# Altium PCB BI_820_Trek_OBD_main_hv2.PcbDoc
Units mm, origin at the board's own origin, x right, y up, seen from the top; angles counter-clockwise.
Board outline 75 x 64 mm, 4 copper layers (Top Layer, GND, VCC, Bottom Layer), stack 1.676 mm thick; 113 components, 73 nets, 415 pads, 243 vias.
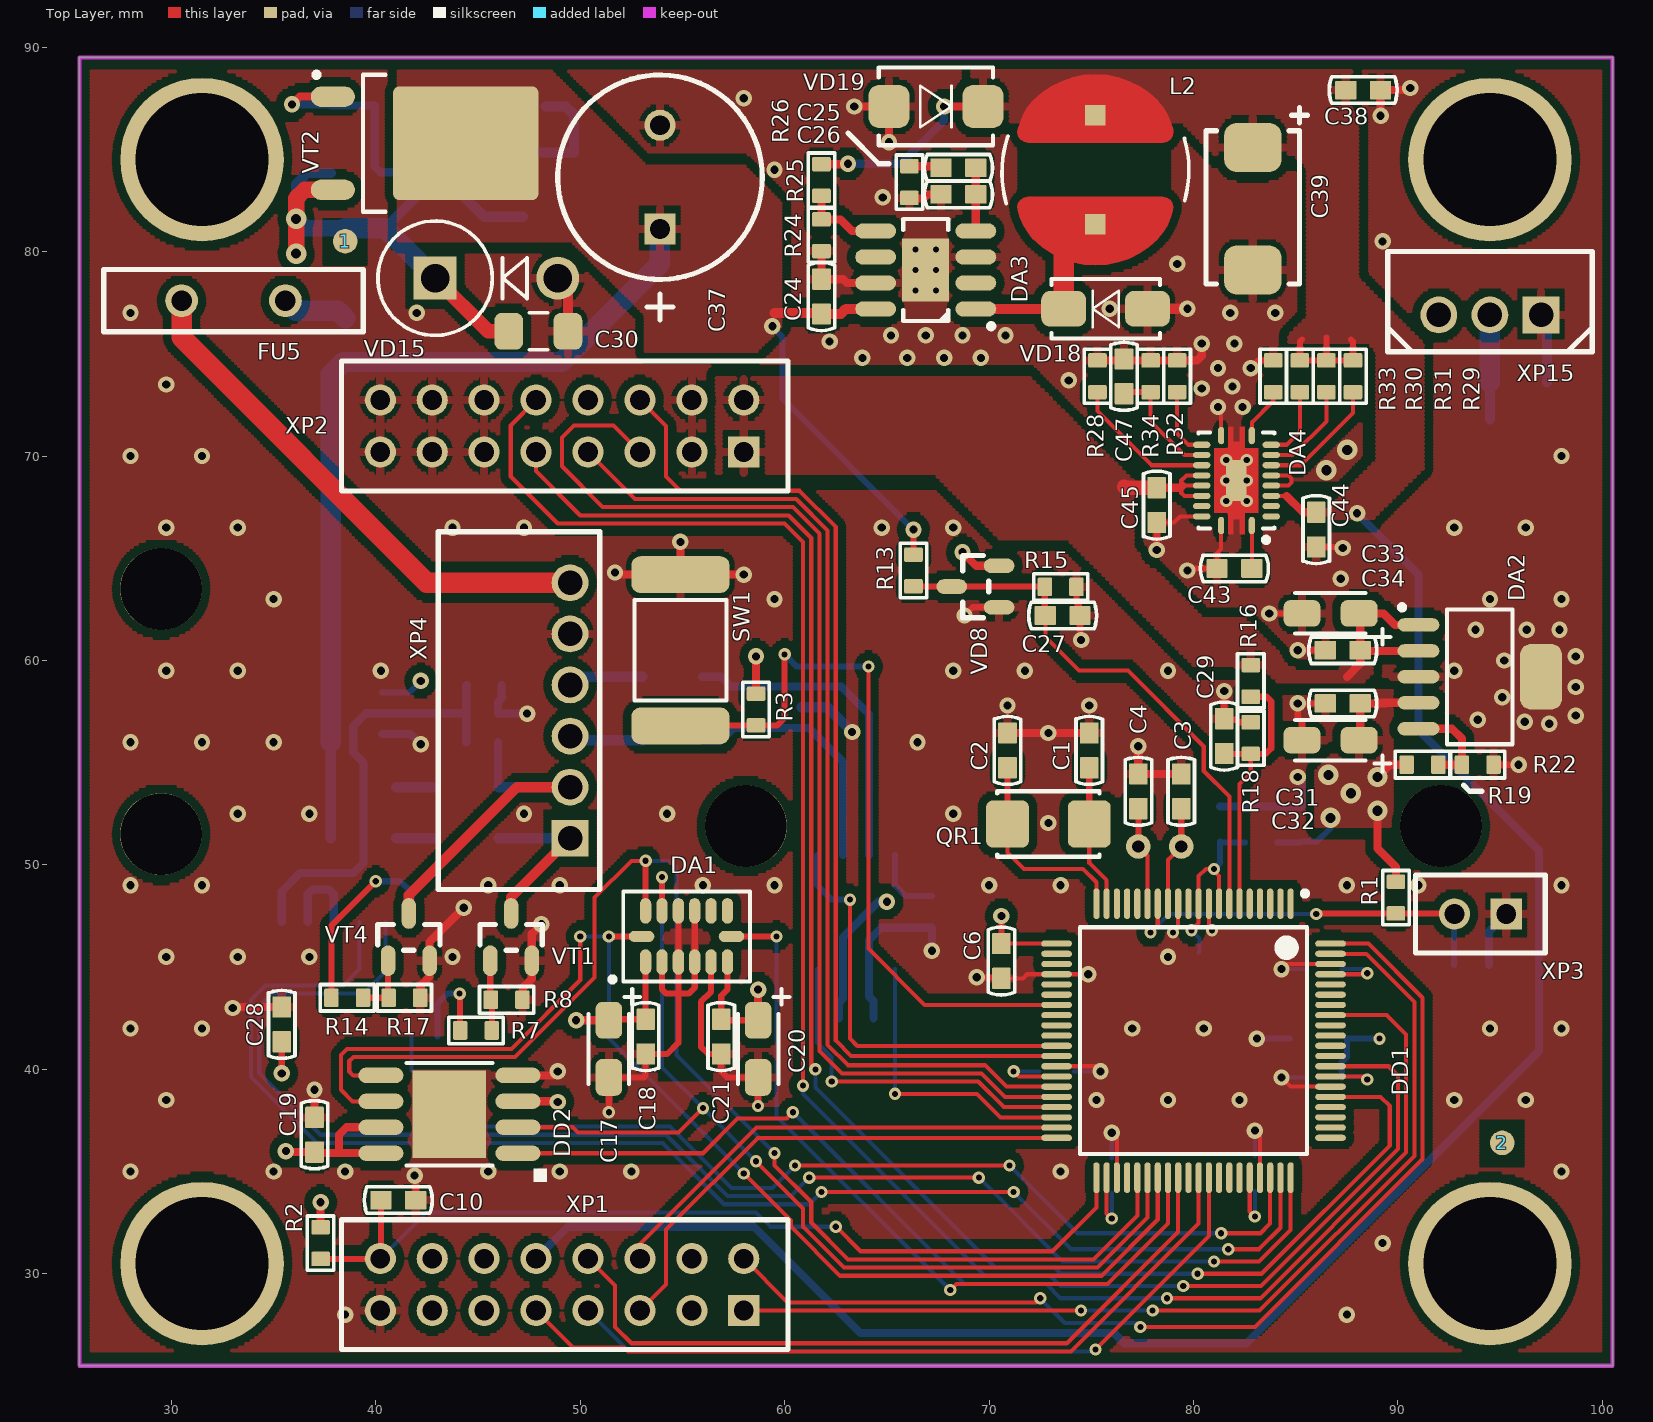
[diagram p0: Top Layer view]
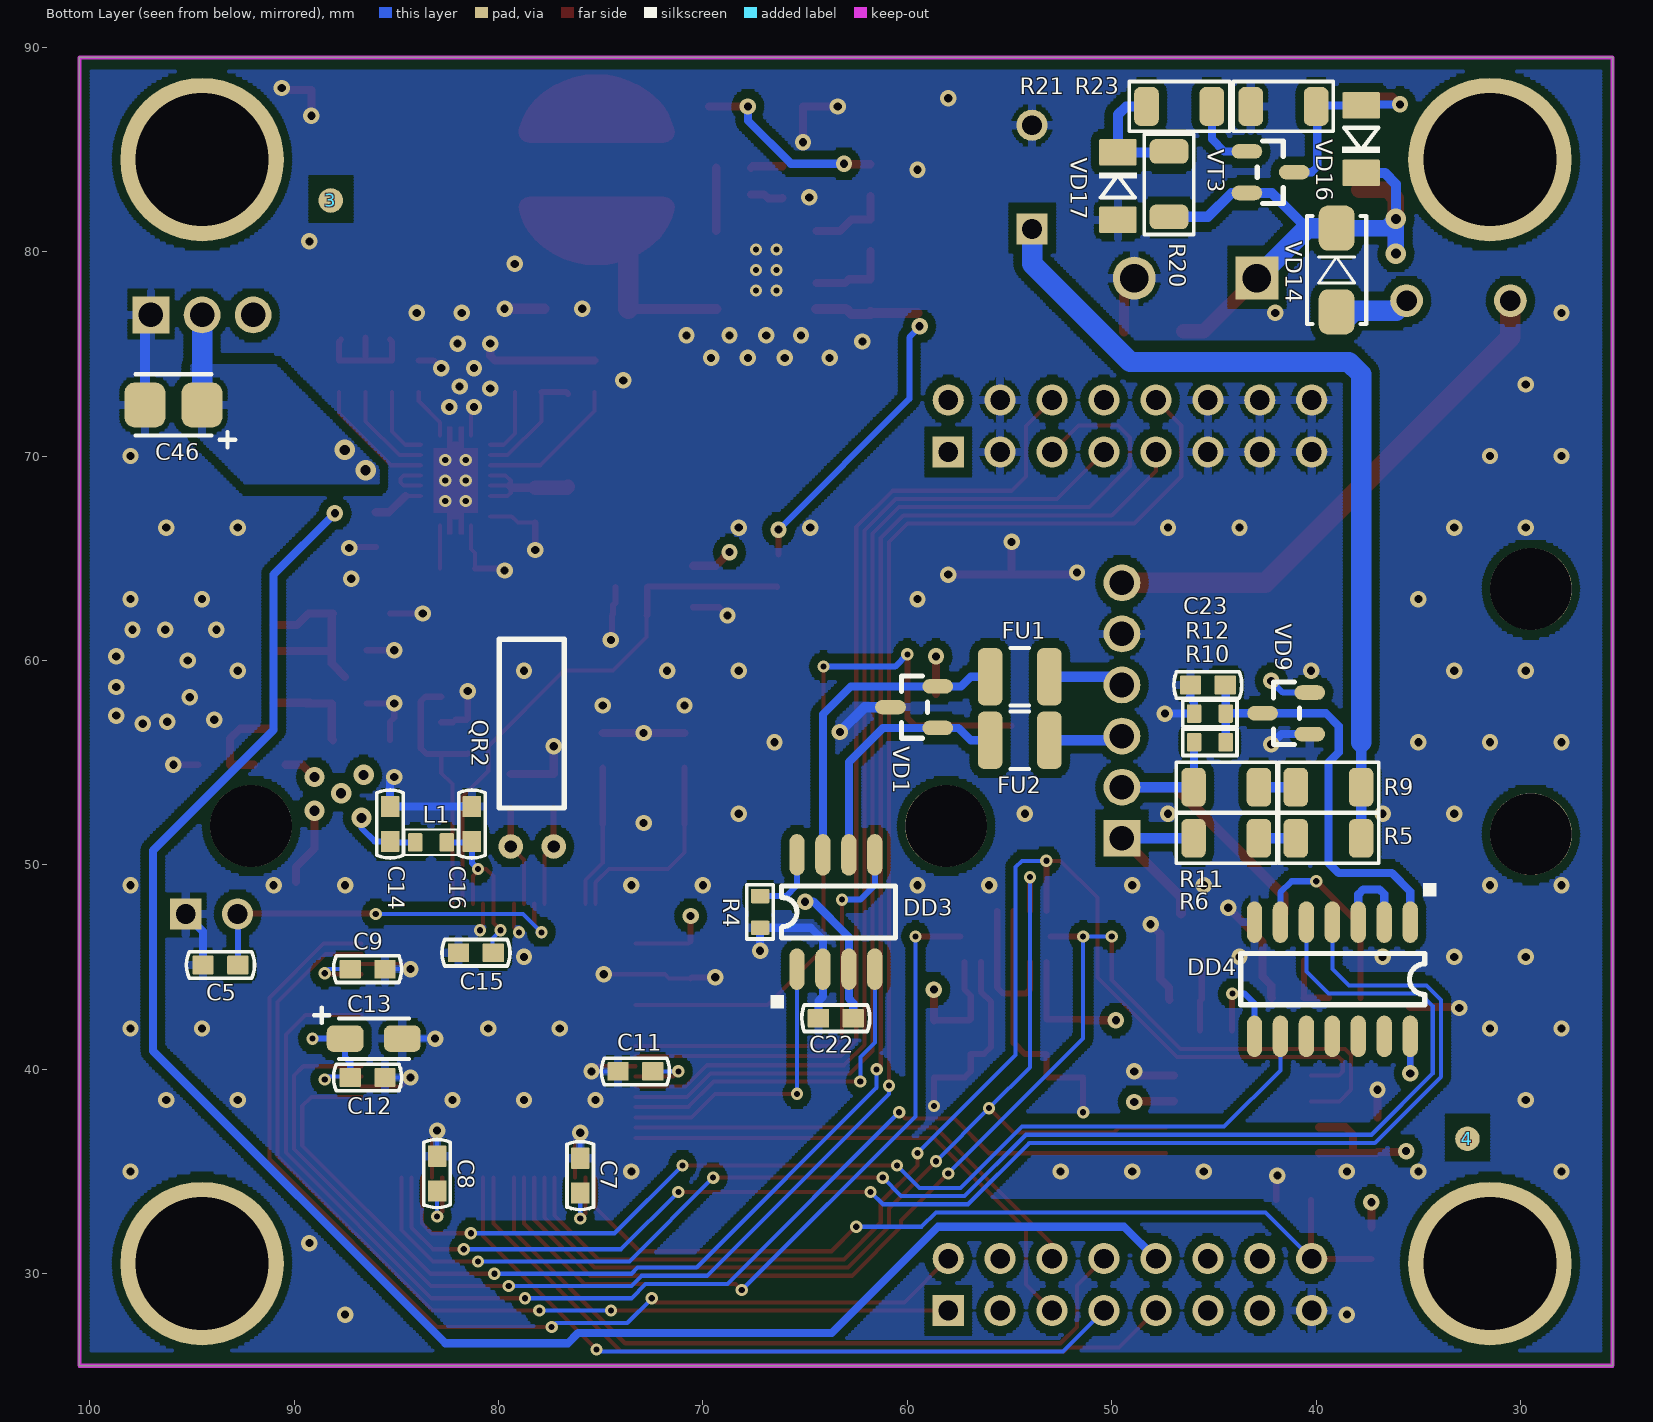
[diagram p1: Bottom Layer view, seen from below]
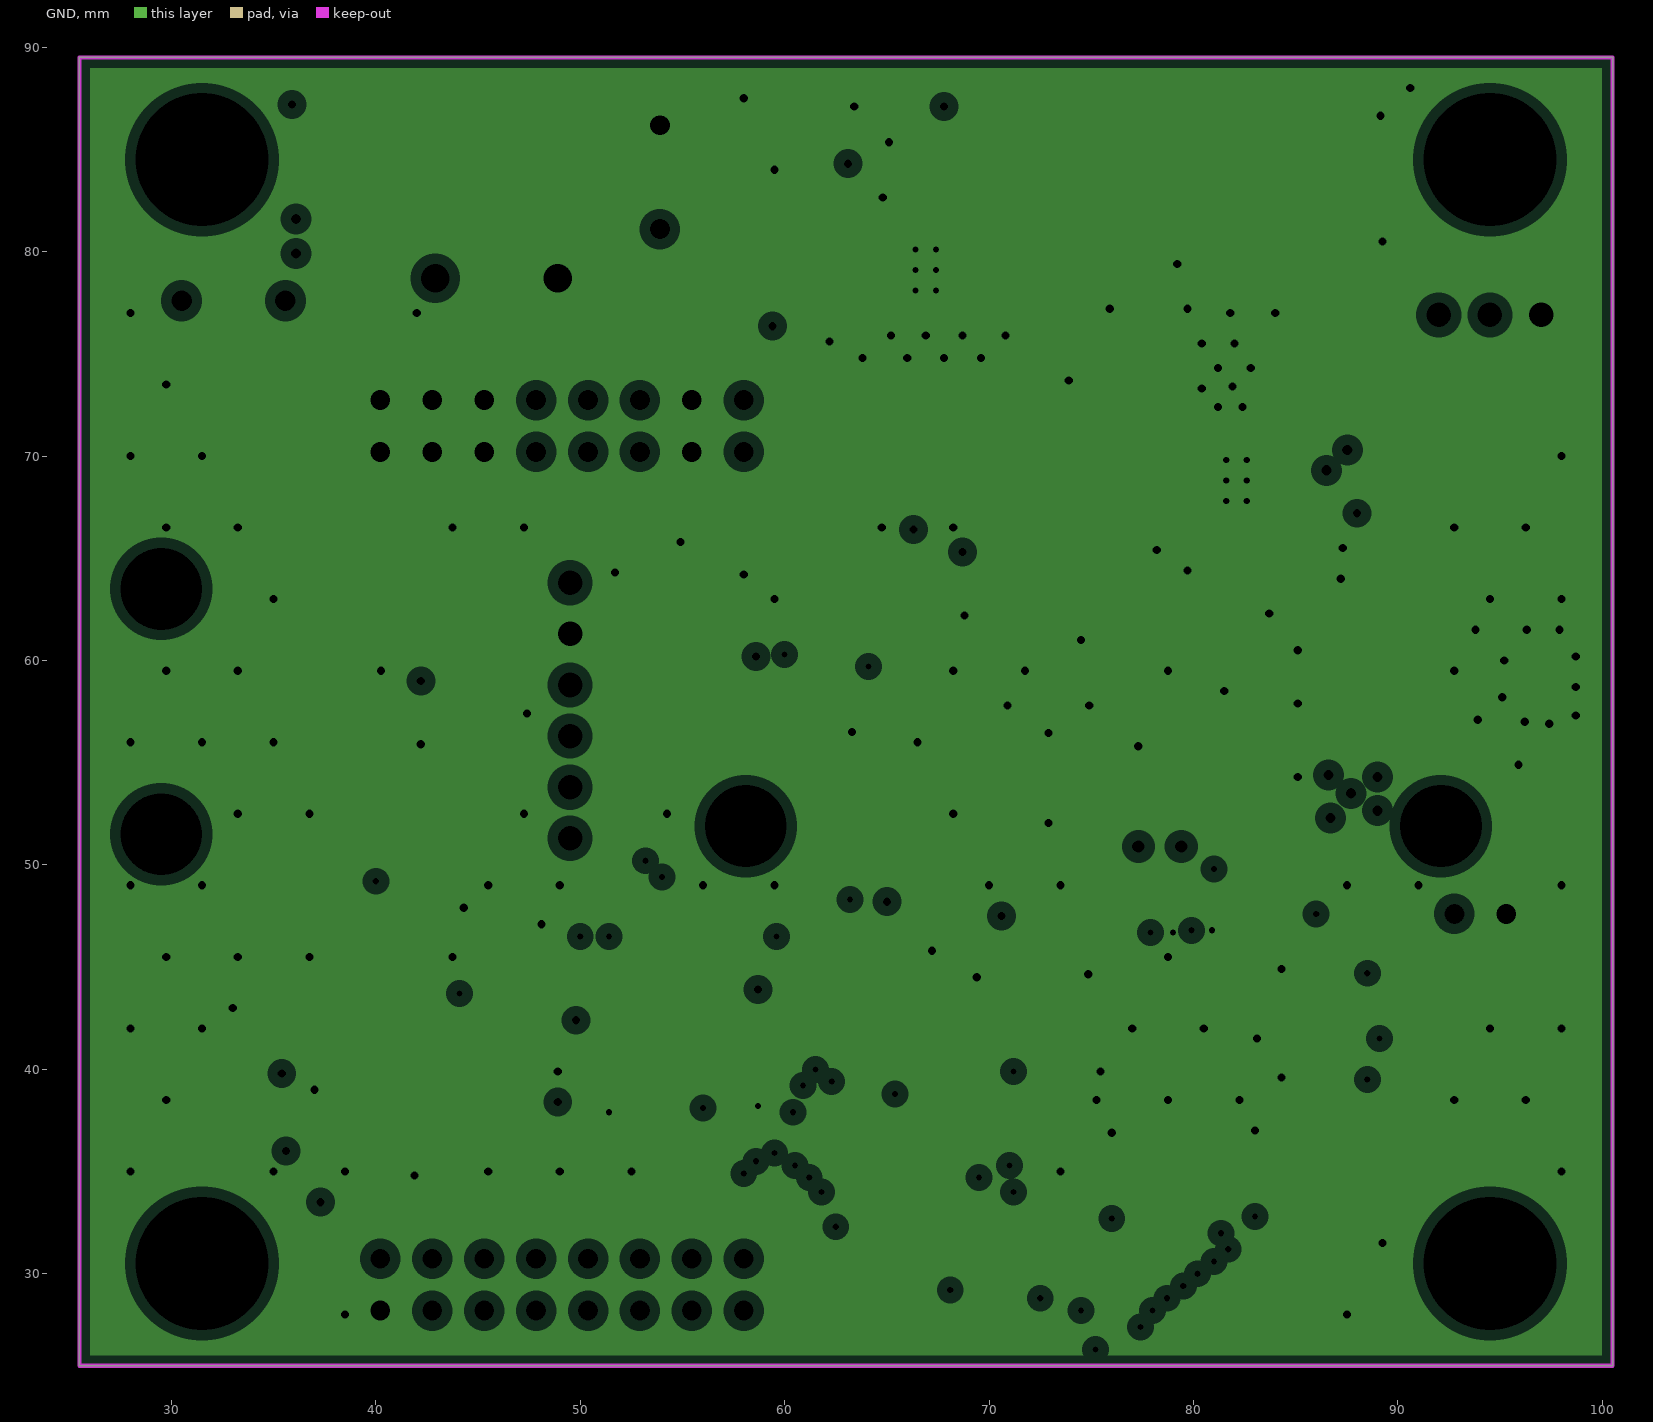
[diagram p2: GND, clearances drawn from the general rule]
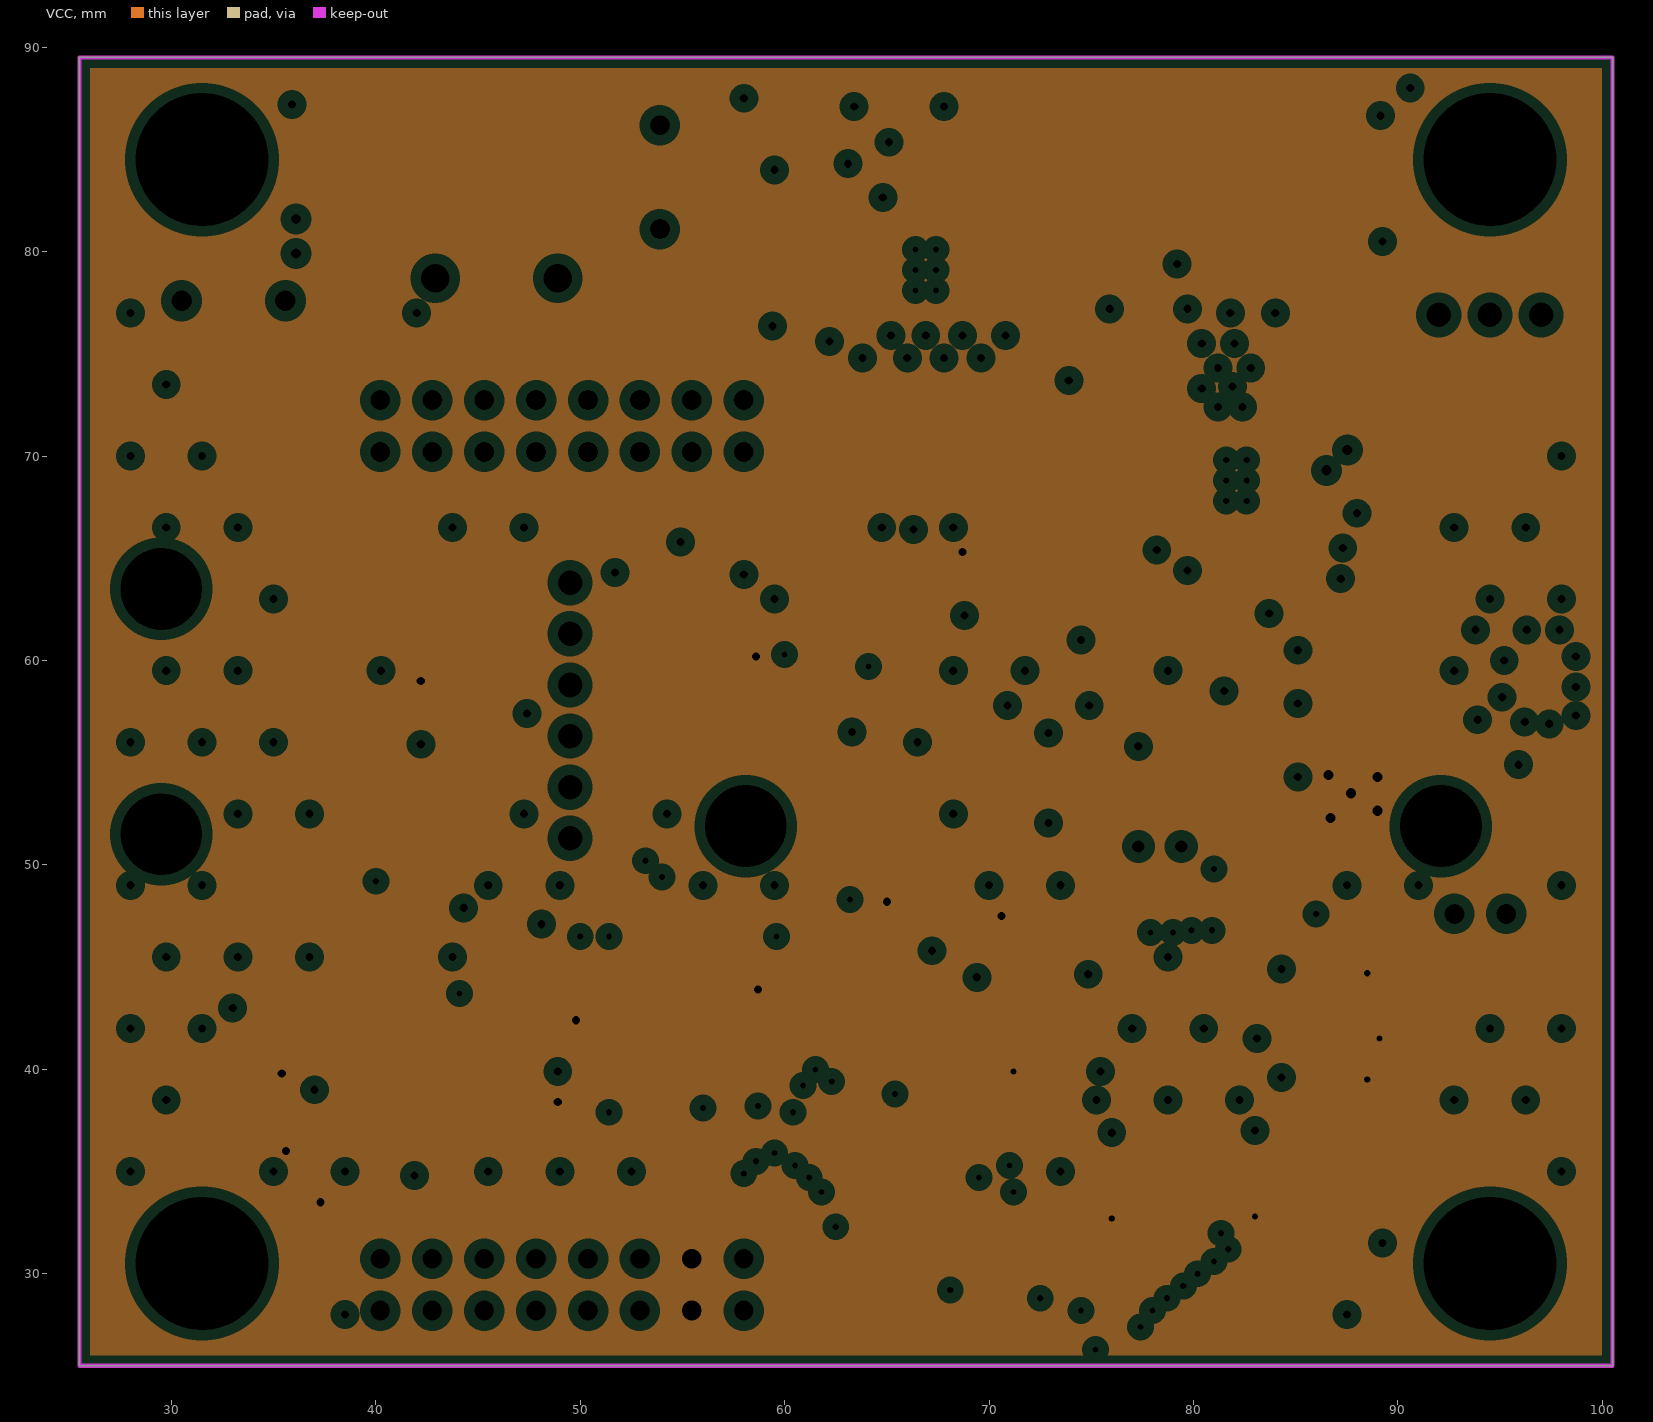
[diagram p3: VCC, clearances drawn from the general rule]

## Layer stack, top to bottom
Top Solder: solder mask 0.0102, Solder Resist, Dk 3.5
Top Layer: signal copper 0.035
Dielectric1: prepreg 0.25, FR-4, Dk 4.4
GND: plane copper 0.018, net GND
Dielectric2: core 1, FR-4, Dk 4.4
VCC: plane copper 0.018, net +3V
Dielectric3: prepreg 0.32, FR-4, Dk 4.8
Bottom Layer: signal copper 0.035
Bottom Solder: solder mask 0.0102, Solder Resist, Dk 3.5

## Board outline
25.5,25.5 100.5,25.5 100.5,89.5 25.5,89.5

## Design rules (kind name [scope] priority, off if disabled: settings)
Clearance Clearance_keepout [IsKeepOut] p1: gap=0.4
Clearance Clearance_Poly [All vs InPoly] p2: gap=0.4
Clearance [All] p3: gap=0.2
ComponentClearance [All] p1: gap=0 collisioncheckmode=3 verticalgap=0 showdistances=FALSE
HoleSize [All] p1: absolutevalues=TRUE maxlimit=8 minlimit=0.025 maxpercent=80.000 minpercent=20.000
MinimumSolderMaskSliver [All] p1: minsoldermaskwidth=0.076
PlaneClearance [All] p1: clearance=0.508
PlaneConnect [All] p1: planeconnectstyle=Relief reliefexpansion=0.2 reliefentries=4 reliefconductorwidth=0.254 reliefairgap=0.2
PolygonConnect PolygonConnect_DA2 [IsPad And (PadYSize_TopLayer > 1.5) And (InComponent(DA2) Or InComponent(DA3))] p1: connectstyle=Direct reliefconductorwidth=0.254 reliefentries=4 polygonreliefangle="90 Angle" airgapwidth=0.254
PolygonConnect PolygonConnect_Thermal [PadYSize_TopLayer > 3] p2: connectstyle=Direct reliefconductorwidth=0.254 reliefentries=4 polygonreliefangle="90 Angle" airgapwidth=0.254
PolygonConnect PolygonConnect_VIA [IsVia] p3: connectstyle=Direct reliefconductorwidth=0.254 reliefentries=4 polygonreliefangle="90 Angle" airgapwidth=0.254
PolygonConnect [All] p4: connectstyle=Relief reliefconductorwidth=0.4 reliefentries=4 polygonreliefangle="90 Angle" airgapwidth=0.254
RoutingVias [All] p1: holewidth=0.3 width=0.6 viastyle="Through Hole" minholewidth=0.3 minwidth=0.6 maxholewidth=0.5 maxwidth=1
SilkToSilkClearance [All] p1: silktosilkclearance=0
SilkToSolderMaskClearance SilkToSolderMaskClearance1 [IsPad And (InComponent('DA4') Or InComponent('L2'))] p1: minsilkscreentomaskgap=0 clearancetoexposedcopper=TRUE
SilkToSolderMaskClearance SilkscreenOverComponentPads [IsPad] p2: minsilkscreentomaskgap=0.05 clearancetoexposedcopper=TRUE
SolderMaskExpansion SolderMaskExpansion_DA1 [IsPad And InComponent(DA1)] p1: expansion=0.05
SolderMaskExpansion SolderMaskExpansion_VIA [IsVia] p2: expansion=-25.4
SolderMaskExpansion SolderMaskExpansion_1 [IsPad And PadYSize_TopLayer < 0.4] p3: expansion=0.05
SolderMaskExpansion [All] p4: expansion=0.076
Width [All] p1: maxlimit=1 minlimit=0.2 preferedwidth=0.3
23 further rules are at their usual default settings.

## Classes and differential pairs
component class CPU: C1 C2 C3 C4 C5 C6 C7 C8 C9 C10 C11 C12 C13 C14 C15 C16 C17 C18 C19 C20 C21 DA1 DD1 DD2 L1 QR1 QR2 R1 R2 R3 SW1 XP3
component class IO: C22 C23 C27 C28 C29 DD3 DD4 FU1 FU2 R4 R5 R6 R7 R8 R9 R10 R11 R12 R13 R14 R15 R16 R17 R18 VD1 VD8 VD9 VT1 VT4 XP1 XP2 XP4
component class Power: C24 C25 C26 C30 C31 C32 C33 C34 C37 C38 C39 C43 C44 C45 C46 C47 DA2 DA3 DA4 FU5 L2 R19 R20 R21 R22 R23 R24 R25 R26 R28 R29 R30 R31 R32 R33 R34 VD14 VD15 VD16 VD17 VD18 VD19 VT2 VT3 XP15

## Components (designator, comment, footprint, x,y, rotation, side; value= is the part's Value field where it differs from the comment)
1 "Comment" REPER1.2 38.5,80.5 r0 top
2 "Comment" REPER1.2 95.1,36.4 r0 top
3 "Comment" REPER1.2 88.2,82.5 r180 bottom
4 "Comment" REPER1.2 32.6,36.6 r180 bottom
C1 "22 pF" CC0603-3M 74.9,55.6 r270 top
C2 "22 pF" CC0603-3M 70.9,55.6 r270 top
C3 "22 pF" CC0603-3M 79.4,53.6 r270 top
C4 "22 pF" CC0603-3M 77.3,53.6 r270 top
C5 "220 pF" CC0603-3M 93.6,45.1 r180 bottom
C6 "0.1 uF" CC0603-3M 70.6,45.3 r90 top
C7 "0.1 uF" CC0603-3M 76,34.8 r270 bottom
C8 "0.1 uF" CC0603-3M 83,34.9 r270 bottom
C9 "0.1 uF" CC0603-3M 86.4,44.9 r0 bottom
C10 "220 pF" CC0603-3M 41.1,33.6 r0 top
C11 "0.1 uF" CC0603-3M 73.3,39.9 r180 bottom
C12 "0.1 uF" CC0603-3M 86.4,39.6 r0 bottom
C13 "10uF x 6.3V" TAJ-A_M 87.5,41.5 r180 bottom
C14 "0.1 uF" CC0603-3M 85.3,52 r270 bottom
C15 "0.1 uF" CC0603-3M 81.1,45.7 r180 bottom
C16 "0.1 uF" CC0603-3M 81.3,52 r270 bottom
C17 "10uF x 6.3V" TAJ-A_M 51.4,42.4 r270 top
C18 "0.1 uF" CC0603-3M 53.2,41.6 r90 top
C19 "0.1 uF" CC0603-3M 37,36.8 r270 top
C20 "10uF x 6.3V" TAJ-A_M 58.7,42.4 r270 top
C21 "0.1 uF" CC0603-3M 56.9,41.6 r90 top
C22 "0.1 uF" CC0603-3M 63.5,42.5 r0 bottom
C23 "220 pF" CC0603-3M 45.3,58.8 r0 bottom
C24 "0.1 uF" CC0603-3M 61.8,77.8 r90 top
C25 "22 nF" CC0603-3M 68.5,84.1 r180 top
C26 "220 pF" CC0603-3M 68.5,82.8 r180 top
C27 "0.1 uF" CC0603-3M 73.6,62.2 r0 top
C28 "0.1 uF" CC0603-3M 35.4,42.2 r270 top
C29 "0.1 uF" CC0603-3M 81.5,56.3 r90 top
C30 "0.1 uF 250V" CC1206-MIDI 46.5,76.1 r0 top
C31 "0.1 uF" CC0603-3M 87.3,57.9 r0 top
C32 "4.7uF x 16V" TAJ-A_M 88.1,56.1 r180 top
C33 "4.7uF x 16V" TAJ-A_M 88.1,62.3 r180 top
C34 "0.1 uF" CC0603-3M 87.3,60.5 r0 top
C37 "220uF x 50V" CC16X10_CAP0.5(1)(Primary) 53.9,81.1 r90 top
C38 "0.1 uF" CC0603-3M 88.3,87.9 r0 top
C39 "470uF x 6.3V" TAJ-D-1M 82.9,82.1 r270 top
C43 "0.1 uF" CC0603-3M 82,64.5 r180 top
C44 "1 uF" CC0603-3M 86,66.4 r270 top
C45 "1 uF" CC0603-3M 78.2,67.6 r270 top
C46 "47uF x 6.3V" TAJ-B-1M 94.5,72.5 r0 bottom
C47 "10 nF" CC0603-3M 76.6,73.9 r90 top
DA1 "MMA7455L" LGA-14 55.2,46.5 r0 top
DA2 "MCP1824T-ADJE/DC" SOT223-6 94,59.2 r0 top
DA3 "L5973D" SO-8_EXP_PAD 66.9,79.1 r180 top
DA4 "BQ24070" P-PQFP-N20 82.1,68.8 r90 top
DD1 "LPC1754FBD80" TQFP-80_0.5 80,41.4 r270 top
DD2 "M25PE16-VMW" MLP8-EIAJ_SO8 43.6,37.8 r180 top
DD3 "SN65HVD234D" SO-8 65.4,44.9 r180 bottom
DD4 "SN74HC14D" SO14 35.4,47.2 r0 bottom
FU1 "MICROSMD010F" RC1210 54.5,59.2 r0 bottom
FU2 "MICROSMD010F" RC1210 54.5,56.1 r0 bottom
FU5 "RXE-110" RXE-110 30.5,77.6 r0 top
L1 "10uH" L0603 83.3,51.1 r180 bottom
L2 "15 uH" SDR0805 75.2,84 r90 top
QR1 "12.0 MHz" AC5032_2 72.9,52 r180 top
QR2 "32768 Hz" QR_32768 79.4,50.9 r90 bottom
R1 "10k" RC0603-3M 89.9,48.4 r90 top
R2 "10k" RC0603-3M 37.3,31.5 r90 top
R3 "10k" RC0603-3M 58.6,57.6 r90 top
R4 "0" RC0603-3M 67.2,47.7 r270 bottom
R5 "270" RC1206-2M 41,51.3 r180 bottom
R6 "240" RC1206-2M 46,51.3 r180 bottom
R7 "4k7" RC0603-3M 44.9,41.9 r0 top
R8 "47k" RC0603-3M 46.4,43.4 r0 top
R9 "270" RC1206-2M 41,53.8 r180 bottom
R10 "47k" RC0603-3M 45.2,56 r0 bottom
R11 "240" RC1206-2M 46,53.8 r180 bottom
R12 "13k" RC0603-3M 45.2,57.4 r0 bottom
R13 "120k" RC0603-3M 66.3,64.4 r90 top
R14 "4k7" RC0603-3M 38.6,43.5 r0 top
R15 "10k" RC0603-3M 73.5,63.6 r0 top
R16 "12k 1%" RC0603-3M 82.8,59 r90 top
R17 "47k" RC0603-3M 41.4,43.5 r0 top
R18 "20k 1%" RC0603-3M 82.8,56.2 r270 top
R19 "300k 1%" RC0603-3M 91.2,54.9 r180 top
R20 "220k" RC1206-2M 47.2,84.9 r270 bottom
R21 "220k" RC1206-2M 48.3,87.1 r180 bottom
R22 "47k 1%" RC0603-3M 93.9,54.9 r180 top
R23 "220k" RC1206-2M 40,87.1 r0 bottom
R24 "4k7 1%" RC0603-3M 61.8,80.8 r90 top
R25 "12k 1%" RC0603-3M 61.8,83.5 r90 top
R26 "4k7" RC0603-3M 66.1,83.4 r270 top
R28 "51k" RC0603-3M 75.3,73.9 r270 top
R29 "100k" RC0603-3M 87.8,73.9 r270 top
R30 "100k" RC0603-3M 85.2,73.9 r270 top
R31 "100k" RC0603-3M 86.5,73.9 r270 top
R32 "10k" RC0603-3M 79.2,73.9 r270 top
R33 "2k" RC0603-3M 83.9,73.9 r270 top
R34 "36k" RC0603-3M 77.9,73.9 r270 top
SW1 "LYS-Z07" LYS-Z07 54.9,56.8 r90 top
VD1 "PESD2CAN" SOT-23(123) 58.5,56.7 r180 bottom
VD8 "BAT54S" SOT-23(GSD) 70.5,62.6 r90 top
VD9 "BAT54S" SOT-23(GSD) 40.3,56.4 r90 bottom
VD14 "GS1M" SMA 39,79.1 r90 bottom
VD15 "1.5KE150A" DO-201 48.9,78.7 r180 top
VD16 "BZV55C15" SOD-80 37.8,85.5 r90 bottom
VD17 "BZV55C33" SOD-80 49.7,83.2 r270 bottom
VD18 "SK34SMA" SMA 75.7,77.2 r180 top
VD19 "SMBJ5.0A" SMB 67.4,87.1 r180 top
VT1 "BC846B" SOT-23(123) 45.6,45.3 r270 top
VT2 "IRFR9220" D-PAK(TO-252AA) 42.4,85.3 r0 top
VT3 "BC856B" SOT-23(123) 43.4,84.9 r0 bottom
VT4 "BC846B" SOT-23(123) 40.6,45.3 r270 top
XP1 "PBD-16" PBD16 58,28.2 r180 top
XP2 "PBD-16" PBD16 58,70.2 r180 top
XP3 "PLS-02" PIN2W 95.3,47.6 r180 top
XP4 "MW06R" MW06R 49.5,51.3 r90 top
XP15 "MW03D" MW03D 97,76.9 r180 top

## Footprints (in the part's own frame and the unit in brackets; to place one, negate y for a bottom-side part, rotate by r counter-clockwise, add the part's x,y. Pads: shape width x height; smd on the part's side, far side on the other; paste and mask are expansions set on the pad)
AC5032_2 [mm]
  rrect30% 2.1x2.3 smd: 1(-2,0) 2(2,0)
  silkscreen extent -2.5,-1.6 2.5,1.6
CC16X10_CAP0.5(1)(Primary) [mil]
  round 60 hole 38: 1(200,0)
  rect 60x60 hole 38: 2(0,0)
  silkscreen extent -175,-197 297,197
CC0603-3M [mil]
  rrect10% 40.98x35.98 smd paste-1000: 1(-33.5,0) 2(33.5,0)
  silkscreen extent -65,-26 65,26
CC1206-MIDI [mm]
  rrect50% 1.4x1.8 smd: 1(0,0) 2(2.9,0)
  silkscreen extent 1,-0.9 1.9,0.9
D-PAK(TO-252AA) [mm]
  oval 2.15x1 smd: 1(-4.5,2.28) 2(-4.5,-2.28)
  rrect10% 7.1x5.55 smd: 3(2,0)
  silkscreen extent -5.42,-3.35 -1.92,3.47
DO-201 [mm]
  round 2.1 hole 1.4: 1(0,0)
  rect 2.1x2.1 hole 1.4: 2(6,0)
  silkscreen extent 1.5,-2.8 8.8,2.8
L0603 [mm]
  rrect20% 0.71x0.91 smd paste-25.4: 1(-0.775,0) 2(0.775,0)
  silkscreen extent -1.3,-0.63 1.3,0.63
LGA-14 [mm]
  oval 0.55x1.25 smd: 1(-2,-1.25) 2(-1.2,-1.25) 3(-0.4,-1.25) 4(0.4,-1.25) 5(1.2,-1.25) 6(2,-1.25) 8(2,1.25) 9(1.2,1.25) 10(0.4,1.25) 11(-0.4,1.25) 12(-1.2,1.25) 13(-2,1.25)
  oval 1.25x0.55 smd: 7(2.2,0) 14(-2.2,0)
  silkscreen extent -3.75,-2.22 3.1,2.2
LYS-Z07 [mm]
  rrect50% 1.8x4.8 smd paste-25.4: 1(0,0) 2(7.4,0)
  silkscreen extent 1.25,-2.25 6.15,2.25
MLP8-EIAJ_SO8 [mm]
  oval 2.2x0.75 smd: 1(-3.353,1.905) 2(-3.353,0.635) 3(-3.353,-0.635) 4(-3.353,-1.905) 5(3.353,-1.905) 6(3.353,-0.635) 7(3.353,0.635) 8(3.353,1.905)
  rect 3.6x4.3 smd: 9(0,0)
  silkscreen extent -4.76,-2.5 2.1,3.3
MW03D [mm]
  rect 1.8x1.8 hole 1.2: 1(0,0)
  round 1.8 hole 1.2: 2(2.5,0) 3(5,0)
  silkscreen extent -2.5,-3.1 7.5,1.8
MW06R [mm]
  rect 1.8x1.8 hole 1.2: 1(0,0)
  round 1.8 hole 1.2: 2(2.5,0) 3(5,0) 4(7.5,0) 5(10,0) 6(12.5,0)
  silkscreen extent -2.5,-1.45 15,6.45
P-PQFP-N20 [mm]
  oval 0.85x0.3 smd: 1(-2.2,-0.75) 10(2.2,-0.75) 11(2.2,0.75) 20(-2.2,0.75)
  oval 0.3x0.85 smd: 2(-1.75,-1.7) 3(-1.25,-1.7) 4(-0.75,-1.7) 5(-0.25,-1.7) 6(0.25,-1.7) 7(0.75,-1.7) 8(1.25,-1.7) 9(1.75,-1.7) 12(1.75,1.7) 13(1.25,1.7) 14(0.75,1.7) 15(0.25,1.7) 16(-0.25,1.7) 17(-0.75,1.7) 18(-1.25,1.7) 19(-1.75,1.7)
  rect 2x1 smd paste-25.4 mask-25.4: 21(0,0)
  Top Layer region: -1.575,-1.075 1.575,-1.075 1.575,-0.4 2.625,-0.4 2.625,-0.15 1.9,-0.15 1.9,0.15 2.625,0.15 2.625,0.4 1.575,0.4 1.575,1.075 -1.575,1.075 -1.575,0.4 -2.625,0.4 -2.625,0.15 -1.9,0.15 -1.9,-0.15 -2.625,-0.15 -2.625,-0.4 -1.575,-0.4
  silkscreen extent -3.02,-1.85 2.35,1.85
PBD16 [mil]
  rect 60x60 hole 38: 1(0,0)
  round 60 hole 38: 2(0,-100) 3(100,0) 4(100,-100) 5(200,0) 6(200,-100) 7(300,0) 8(300,-100) 9(400,0) 10(400,-100) 11(500,0) 12(500,-100) 13(600,0) 14(600,-100) 15(700,0) 16(700,-100)
  silkscreen extent -85,-175 775,75
PIN2W [mil]
  rect 60x60 hole 38: 1(0,0)
  round 60 hole 38: 2(100,0)
  silkscreen extent -75,-75 175,75
QR_32768 [mm]
  round 1.2 hole 0.6: 1(0,0) 2(0,-2.1)
  silkscreen extent 1.88,-2.62 10.13,0.56
RC0603-3M [mm]
  rrect20% 0.71x0.91 smd paste-25.4: 1(-0.775,0) 2(0.775,0)
  silkscreen extent -1.32,-0.65 1.33,0.65
RC1206-2M [mm]
  rrect50% 1.2x1.9 smd: 1(0,0) 2(3.2,0)
  silkscreen extent -0.84,-1.22 4.06,1.22
RC1210 [mm]
  rrect50% 1.2x2.8 smd: 1(-1.45,0) 2(1.45,0)
  silkscreen extent -0.45,-1.4 0.45,1.4
REPER1.2 [mm]
  round 1.2 smd paste-25.4 mask-25.4: 1(0,0)
  Top Layer pour cut-out: -1.2,-1.2 1.2,-1.2 1.2,1.2 -1.2,1.2
RXE-110 [mm]
  round 1.6 hole 1: 1(0,0) 2(5.08,0)
  silkscreen extent -3.81,-1.52 8.89,1.52
SDR0805 [mm]
  rect 1x1 smd paste-25.4 mask-25.4: 1(-2.667,0) 2(2.667,0)
  Top Layer region: -1.327,3.319 -1.362,3.503 -1.461,3.66 -1.612,3.771 -1.792,3.818 -1.977,3.797 -2.318,3.69 -2.706,3.535 -3.065,3.321 -3.387,3.053 -3.392,3.047 -3.771,2.627 -4.09,2.16 -4.345,1.654 -4.53,1.119 -4.642,0.565 -4.68,0 -4.642,-0.565 -4.53,-1.119 -4.345,-1.654 -4.09,-2.16 -3.771,-2.627 -3.392,-3.047 -3.381,-3.059 -3.063,-3.323 -2.709,-3.534 -2.325,-3.688 -1.996,-3.791 -1.806,-3.813 -1.62,-3.764 -1.465,-3.65 -1.363,-3.488 -1.327,-3.299
  Top Layer region: 1.327,-3.319 1.362,-3.503 1.461,-3.66 1.612,-3.771 1.792,-3.818 1.977,-3.797 2.318,-3.69 2.706,-3.535 3.065,-3.321 3.387,-3.053 3.392,-3.047 3.771,-2.627 4.09,-2.16 4.345,-1.654 4.53,-1.119 4.642,-0.565 4.68,0 4.642,0.565 4.53,1.119 4.345,1.654 4.09,2.16 3.771,2.627 3.392,3.047 3.381,3.059 3.063,3.323 2.709,3.534 2.325,3.688 1.996,3.791 1.806,3.813 1.62,3.764 1.465,3.65 1.363,3.488 1.327,3.299
  silkscreen extent -1.66,-4.57 1.64,4.57
SMA [mm]
  rrect50% 2.2x1.75 smd: 1(-2.05,0) 2(2.05,0)
  silkscreen extent -2.65,-1.45 2.65,1.45
SMB [mm]
  rrect50% 2x2.1 smd: 1(2.3,0) 2(-2.3,0)
  silkscreen extent -2.8,-1.9 2.8,1.9
SO14 [mil]
  oval 29.53x80 smd: 1(0,0) 2(50,0) 3(100,0) 4(150,0) 5(200,0) 6(250,0) 7(300,0) 8(300,220) 9(250,220) 10(200,220) 11(150,220) 12(100,220) 13(50,220) 14(0,220)
  silkscreen extent -50,-75 326,159
SO-8 [mil]
  oval 29.53x80 smd: 1(0,0) 2(50,0) 3(100,0) 4(150,0) 5(150,220) 6(100,220) 7(50,220) 8(0,220)
  silkscreen extent -50,-75 190,160
SO-8_EXP_PAD [mm]
  oval 2x0.75 smd: 1(-2.45,1.905) 2(-2.45,0.635) 3(-2.45,-0.635) 4(-2.45,-1.905) 5(2.45,-1.905) 6(2.45,-0.635) 7(2.45,0.635) 8(2.45,1.905)
  rect 2.3x3.1 smd paste-25.4: 9(0,0)
  silkscreen extent -3.33,-2.5 1.1,2.87
SOD-80 [mm]
  rrect10% 1.3x1.83 smd paste-25.4: 1(1.651,0) 2(-1.651,0)
  silkscreen extent -0.66,-0.91 0.56,0.91
SOT223-6 [mm]
  oval 2.05x0.65 smd: 1(-3,2.54) 2(-3,1.27) 3(-3,0) 4(-3,-1.27) 5(-3,-2.54)
  rrect50% 2.05x3.2 smd: 6(3,0)
  silkscreen extent -3.92,-3.3 1.6,3.52
SOT-23(123) [mil]
  oval 59.06x28.07 smd: 1(-0.5,0) 2(-0.5,80) 3(-91.5,40)
  silkscreen extent -70,-20 -20,100
SOT-23(GSD) [mil]
  oval 28.07x59.06 smd: 1(0,0.5) 2(80,0.5) 3(40,91.5)
  silkscreen extent -20,21 100,70
TAJ-A_M [mm]
  rrect50% 1.8x1.3 smd: 1(0,0) 2(2.794,0)
  silkscreen extent -1.52,-0.99 3.12,1.52
TAJ-B-1M [mm]
  rrect50% 2x2.2 smd: 1(0,0) 2(2.794,0)
  silkscreen extent -1.63,-1.5 3.25,2.08
TAJ-D-1M [mm]
  rrect50% 2.4x2.8 smd: 1(-2.997,0) 2(2.997,0)
  silkscreen extent -4.95,-2.29 3.68,2.67
TQFP-80_0.5 [mm]
  oval 1.5x0.3 smd: 1(-6.7,4.75) 2(-6.7,4.25) 3(-6.7,3.75) 4(-6.7,3.25) 5(-6.7,2.75) 6(-6.7,2.25) 7(-6.7,1.75) 8(-6.7,1.25) 9(-6.7,0.75) 10(-6.7,0.25) 11(-6.7,-0.25) 12(-6.7,-0.75) 13(-6.7,-1.25) 14(-6.7,-1.75) 15(-6.7,-2.25) 16(-6.7,-2.75) 17(-6.7,-3.25) 18(-6.7,-3.75) 19(-6.7,-4.25) 20(-6.7,-4.75) 41(6.7,-4.75) 42(6.7,-4.25) 43(6.7,-3.75) 44(6.7,-3.25) 45(6.7,-2.75) 46(6.7,-2.25) 47(6.7,-1.75) 48(6.7,-1.25) 49(6.7,-0.75) 50(6.7,-0.25) 51(6.7,0.25) 52(6.7,0.75) 53(6.7,1.25) 54(6.7,1.75) 55(6.7,2.25) 56(6.7,2.75) 57(6.7,3.25) 58(6.7,3.75) 59(6.7,4.25) 60(6.7,4.75)
  oval 0.3x1.5 smd: 21(-4.75,-6.7) 22(-4.25,-6.7) 23(-3.75,-6.7) 24(-3.25,-6.7) 25(-2.75,-6.7) 26(-2.25,-6.7) 27(-1.75,-6.7) 28(-1.25,-6.7) 29(-0.75,-6.7) 30(-0.25,-6.7) 31(0.25,-6.7) 32(0.75,-6.7) 33(1.25,-6.7) 34(1.75,-6.7) 35(2.25,-6.7) 36(2.75,-6.7) 37(3.25,-6.7) 38(3.75,-6.7) 39(4.25,-6.7) 40(4.75,-6.7) 61(4.75,6.7) 62(4.25,6.7) 63(3.75,6.7) 64(3.25,6.7) 65(2.75,6.7) 66(2.25,6.7) 67(1.75,6.7) 68(1.25,6.7) 69(0.75,6.7) 70(0.25,6.7) 71(-0.25,6.7) 72(-0.75,6.7) 73(-1.25,6.7) 74(-1.75,6.7) 75(-2.25,6.7) 76(-2.75,6.7) 77(-3.25,6.7) 78(-3.75,6.7) 79(-4.25,6.7) 80(-4.75,6.7)
  silkscreen extent -7.32,-5.55 5.55,5.58

## Part data
C1 C2 C3 C4 C5 C6 C7 C8 C9 C10 C11 C12 C14 C15 C16 C18 C19 C21 C22 C23 C24 C25 C26 C27 C28 C29 C31 C34 C38 C43 C44 C45 C47: library part CC0603, "CC0603"
C13 C17 C20 C32 C33: library part TAJ-A, "TAJ-A"
C30: library part CC1206, "CC1206"
C37: library part CAP0.5(1), "CAP0.5(1)"
C39: library part TAJ-D, "TAJ-D"
C46: library part TAJ-B, "TAJ-B"
DA2: "300 mA, Low Voltage, Low Quiescent Current LDO Regulator, 5-Pin SOT-223, Extended Temperature, Tape and Reel"
DD1: "Cortex -M3 32-Bit Microcontroller, 128KB Flash, 64KB RAM, 800-Lead LQFP"
DD2: library part S25FL016A0LMFI01, "S25FL016A0LMFI01"
DD3: "CAN Transceiver"
DD4: "Hex Schmitt-Trigger INVERTERS"
FU1 FU2: library part MICROSMD, "MICROSMD"
L1: library part L0603, "L0603"
L2: library part SDR0805, "SDR0805"
QR1: library part AC5032_2, "AC5032/2"
QR2: library part CRYSTAL_32768, "CRYSTAL_32768 Hz"
R1 R2 R3 R4 R7 R8 R10 R12 R13 R14 R15 R16 R17 R18 R19 R22 R24 R25 R26 R28 R29 R30 R31 R32 R33 R34: library part RC0603, "RC0603"
R5 R6 R9 R11 R20 R21 R23: library part RC1206, "RC1206"
SW1: "NC vibration sensor"
VD1: "TVS for CAN"
VD8 VD9: "1.0 Ampere General Purpose Rectifier"
VD15: library part 1.5KE, "1.5KE"
VD16 VD17: library part BZV55C12, "Zener Voltage Regulator Diode"
VD18: "Schottky Rectifier"
VD19: library part SMBJ, "SMBJ"
VT1 VT4: library part BC846BLT1, "BC846BLT1"
VT2: "HEXFET Power MOSFET"
VT3: library part BC857B, "BC857B"
XP3: library part PLD-02

## Free pads (board coordinates)
  round 4 hole 4 unplated: 0(29.5,51.5) 0(29.5,63.5) 0(58.1,51.9) 0(92.1,51.9)
  round 8 hole 6.5 unplated: 0(31.5,30.5) 0(31.5,84.5) 0(94.5,30.5) 0(94.5,84.5)

## Via types
v1: diameter 0.8, hole 0.4, Top Layer to Bottom Layer, 170 vias
v2: diameter 0.6, hole 0.3, Top Layer to Bottom Layer, 64 vias
v3: diameter 1, hole 0.5, Top Layer to Bottom Layer, 9 vias

## Nets (pads, with @x,y where several pads share a name; then routed paths per layer and width w, separated by ;. In a path a pad name is that pad's centre, name@x,y a point inside that pad or via, vN(x,y) a via of type N, cw(c..) or ccw(c..) an arc to the next point about the centre after c; other vN are vias at no path point)
+3V: C6.2 C7.2 C8.2 C9.2 C11.2 C12.2 C13.1 C14.2 C17.1 C18.2 C19.2 C20.1 C21.2 C22.1 C28.2 C31.2 C32.1 DA1.1 DA1.6 DA2.4 DD1.21 DD1.34 DD1.42 DD1.56 DD1.67 DD1.77 DD2.3 DD2.7 DD2.8 DD3.3 DD4.14 L1.1 R1.2 R2.2 R3.2 R19.2 VD8.2 VD9.2 XP1.3 XP1.4 | length 76.9
  Top Layer w0.2: C6.2@70.6,46.251 70.701,46.15 DD1.21 ; v2(71.2,39.9) 71.45,39.65 DD1.34 ; DD1.42 75.75,32.95 v2(76,32.7) ; DD1.56 82.75,33.05 v2(83,32.8) ; DD1.67 88.35,39.65 v2(88.5,39.5) ; DD1.77 v2@88.55,44.65
  Top Layer w0.3: v1(35.4,39.8) C28.2 ; C17.1 51.451,42.451 C18.2 DA1.1 ; DA1.6 57.2,43.9 56.9,43.6 C21.2 56.951,42.4 C20.1 ; C6.2@70.6,46.251 v1(70.6,47.5)
  Top Layer w0.4: v1(35.6,36) 35.651,35.949 C19.2 37.049,35.9 38.2,35.9 ; R2.2 v1(37.3,33.5) ; DD2.8@39.854,35.895 39.849,35.9 38.2,35.9 ; DD2.7@39.854,37.165 38.565,37.165 38.2,36.8 38.2,35.9 ; DD2.3 48.865,38.435 v1(48.9,38.4) ; v1(49.8,42.4) C17.1 ; R3.2 v1(58.6,60.2) ; C20.1 58.7,44.1 v1(58.7,43.9) ; v1(68.7,65.3) 69.368,64.632 VD8.2 ; C32.1 88.151,56.151 C31.2 89.2,57.9 ; v3(89,52.65) 89,50.8 89.9,49.9 R1.2 ; v3(89,54.3) 89.6,54.9 R19.2 ; 89.4,57.9 89.2,57.9 ; DA2.4 89.23,57.93 89.2,57.9
  Bottom Layer w0.2: v2(71.2,39.9) C11.2 ; v2(76,32.7) C7.2 ; v2(83,32.8) C8.2 ; C9.2 88.3,44.9 v2(88.5,44.7) ; C12.2@87.551,39.65 88.35,39.65 v2(88.5,39.5)
  Bottom Layer w0.3: v1(35.4,39.8) DD4.14 ; VD9.2 41.632,58.432 v1(42.2,59) ; L1.1 85.251,51.1 C14.2 86.049,51.149 86.7,51.8 v3(86.7,52.3) ; C12.2 87.251,40.351 87.5,40.6 C13.1 v2(89.1,41.5)
  Bottom Layer w0.4: C22.1 62.649,43.249 62.86,43.46 DD3.3 62.86,46.46 64.6,48.2 v1(65,48.2)
  other v3: 87.7,53.5 86.6,54.4
CAN_D: DD1.38 DD3.1 | length 14.5
  Top Layer w0.2: v2(65.4,38.8) 69.4,38.8 70.55,37.65 DD1.38
  Bottom Layer w0.2: v2(65.4,38.8) DD3.1
CAN_EN: DD1.31 DD3.5 | length 20.4
  Top Layer w0.2: v2(63.2,48.3) 63.2,41.5 63.55,41.15 DD1.31
  Bottom Layer w0.3: DD3.5 61.59,49.01 62.3,48.3 v2(63.2,48.3)
CAN_H: FU1.1 XP4.4 | length 3.7
  Bottom Layer w0.5: XP4.4 49.9,59.2 FU1.1
CAN_L: FU2.1 XP4.3 | length 3.6
  Bottom Layer w0.5: XP4.3 49.7,56.1 FU2.1
CAN_R: DD1.37 DD3.4 | length 17.3
  Top Layer w0.2: v2(62.3,39.4) 69.469,39.4 70.719,38.15 DD1.37
  Bottom Layer w0.2: DD3.4 61.59,41.31 62.3,40.6 v2(62.3,39.4)
GND: C1.1 C2.1 C3.1 C4.1 C5.1 C6.1 C7.1 C8.1 C9.1 C10.2 C11.1 C12.1 C13.2 C14.1 C15.1 C16.1 C17.2 C18.1 C19.1 C20.2 C21.1 C22.2 C23.2 C24.2 C26.2 C27.2 C28.1 C29.2 C30.2 C31.1 C32.2 C33.2 C34.1 C37.1 C38.2 C39.2 C43.2 C44.2 C45.2 C46.2 C47.2 DA1.2 DA1.3 DA1.4 DA1.5 DA1.10 DA1.11 DA2.3 DA2.6 DA3.3 DA3.7 DA3.9 DA4.11 DA4.19 DA4.20 DA4.21 DD1.9 DD1.12 DD1.24 DD1.33 DD1.43 DD1.57 DD1.66 DD1.78 DD2.4 DD2.9 DD3.2 DD4.7 R4.2 R8.2 R12.2 R15.2 R17.2 R18.1 R22.1 R23.2 R24.1 R26.2 R28.1 R32.1 R33.1 R34.1 SW1.2 VD1.3 VD8.1 VD9.1 VD15.1 VD17.1 VD18.1 VD19.1 VT1.2 VT4.2 XP1.15 XP2.3 XP2.4 XP2.11 XP2.12 XP2.13 XP2.14 XP2.15 XP2.16 XP3.1 XP4.5 XP15.1 | length 166.3
  Top Layer w0.2: C6.1 71.649,44.449 71.85,44.65 DD1.24 v1(74.85,44.65) ; DD1.33 75.15,40.15 75.4,39.9 v1(75.45,39.9) ; v1(76,36.9) 76.25,36.65 DD1.43 ; C45.2 79.049,66.749 79.35,67.05 DA4.19 ; v2(79,46.7) 79.25,46.95 DD1.12 ; DD1.9 80.75,46.95 v2(80.9,46.8) ; C43.2 81.149,65.249 81.35,65.45 DA4.20 ; DA4.11 v1@81.35,72.05 ; v1(83,37) 83.25,36.75 DD1.57 ; v1(84.3,39.6) 84.75,39.15 DD1.66 ; v1(84.3,44.9) 84.55,45.15 DD1.78
  Top Layer w0.3: C10.2 v1@41.951,34.851 ; v2(51.4,37.9) C17.2 53.106,39.606 53.2,39.7 C18.1 54.249,40.749 54.8,41.3 54.8,43.7 ; DA1.2 54,43.9 54.2,43.7 54.8,43.7 ; DA1.11 DA1.3 54.8,43.7 ; DA1.10 DA1.4 55.6,44 55.3,43.7 54.8,43.7 ; DA1.5 56.4,43.8 55.9,43.3 55.9,41.1 56.251,40.749 C21.1 56.9,39.9 57.194,39.606 C20.2 v2(58.7,38.2) ; v1(68.8,62.2) 69.2,62.6 VD8.1 ; v1(69.4,44.5) 70.549,44.5 C6.1 ; R15.2 74.275,62.825 74.4,62.7 74.4,62.251 C27.2 v1@74.451,61.049 ; v1(78.2,65.4) C45.2 ; v1(79.7,64.4) 79.8,64.5 C43.2 ; v1(81.5,58.5) C29.2 81.551,57.1 82.1,57.1 82.225,56.975 R18.1 ; v1(82.8,74.3) 83.175,74.675 R33.1 ; v1(83.7,62.3) C33.2 ; v1(85.1,60.5) C34.1 ; C32.2 85.306,56.994 85.1,57.2 v1(85.1,57.9) C31.1 ; C44.2 87.251,65.549 v1(87.3,65.5) ; R22.1 v1(95.9,54.9)
  Top Layer w0.4: v1(33,43.002) 33.049,43.051 C28.1 ; C19.1 v1(37,39) ; R17.2 42.2,43.525 42.2,44.1 42.632,44.532 VT4.2 42.632,46.232 v1(44.3,47.9) ; DD2.4 48.705,39.705 v1(48.9,39.9) ; R8.2 47.2,43.425 47.2,44 47.632,44.432 VT1.2 47.632,46.632 v1(48.1,47.1) ; v1(51.7,64.3) 51.7,64.2 SW1.2 ; v1(54.9,65.8) SW1.2 ; v1(58,64.2) SW1.2 ; R24.1 C24.2 62.849,78.651 63.035,78.465 DA3.7 ; v1(63.4,87.1) VD19.1 v1@65.1,85.2 ; R26.2 66.125,82.6 66.8,82.6 67,82.8 C26.2 ; C2.1 v1(72.9,56.451) C1.1 ; R28.1 R34.1 R32.1 80.175,74.675 80.4,74.9 v1(80.4,75.5) ; v1(77.3,55.8) C4.1 C3.1 ; v1(89.151,86.649) C38.2 90.6,87.9 v1(90.6,88)
  Top Layer w0.5: VD15.1 49.4,78.2 C30.2 ; VD18.1 v1(79.7,77.2)
  Bottom Layer w0.2: C11.1 v1(75.45,39.9) ; C7.1 v1@76,37 ; C8.1 v1(83,37) ; v1(84.3,39.6) C12.1 ; v1(84.3,44.9) C9.1
  Bottom Layer w0.3: v1(83.1,41.5) C13.2
  Bottom Layer w0.4: VD9.1 41.7,56.4 v1(42.2,55.9) ; C23.2 46.151,58.249 46.2,58.2 45.975,57.975 R12.2 v1(47.4,57.4) ; C22.2 64.351,43.349 64.13,43.57 DD3.2 64.13,46.33 64.725,46.925 R4.2 v1(67.2,45.8) ; C16.1 C14.1 85.3,54.1 v1(85.1,54.3) ; C5.1 94.451,46.751 XP3.1
  Bottom Layer w0.5: VD1.3 62.084,57.716 v1(63.3,56.5) ; XP15.1 97.294,76.606 97.294,73.6
  other v1: 38.5,28 87.5,28 89.25,31.5 41.9,34.8 28,35 35,35 38.5,35 45.5,35 49,35 52.5,35 73.5,35 98,35 29.75,38.5 75.25,38.5 78.75,38.5 82.25,38.5 92.75,38.5 96.25,38.5 28,42 31.5,42 77,42 80.5,42 94.5,42 98,42 29.75,45.5 33.25,45.5 36.75,45.5 43.75,45.5 78.75,45.5 28,49 31.5,49 45.5,49 49,49 56,49 59.5,49 70,49 73.5,49 87.5,49 91,49 98,49 72.9,52.05 33.25,52.5 36.75,52.5 47.25,52.5 54.25,52.5 68.25,52.5 28,56 31.5,56 35,56 66.5,56 97.4,56.9 96.2,57 93.9,57.1 98.7,57.3 70.9,57.8 74.9,57.8 95.1,58.2 98.7,58.7 29.75,59.5 33.25,59.5 40.25,59.5 68.25,59.5 71.75,59.5 78.75,59.5 92.75,59.5 95.2,60 98.7,60.2 74.5,61 93.8,61.5 96.3,61.5 97.9,61.5 35,63 59.5,63 94.5,63 98,63 87.2,64 29.75,66.5 33.25,66.5 43.75,66.5 47.25,66.5 64.75,66.5 68.25,66.5 92.75,66.5 96.25,66.5 28,70 31.5,70 98,70 81.2,72.4 82.4,72.4 80.4,73.3 81.9,73.4 29.75,73.5 73.9,73.7 81.2,74.3 63.8,74.8 66,74.8 67.8,74.8 69.6,74.8 82,75.5 62.2,75.6 65.2,75.9 66.9,75.9 68.7,75.9 70.8,75.9 28,77 42,77 81.8,77 84,77 75.9,77.2 79.2,79.4 89.25,80.5 64.8,82.65 59.5,84 65.1,85.35 58,87.5
  other v2: 81.6,67.8 82.6,67.8 81.6,68.8 82.6,68.8 81.6,69.8 82.6,69.8 66.4,78.1 67.4,78.1 66.4,79.1 67.4,79.1 66.4,80.1 67.4,80.1
GPS_ON: DD1.52 XP1.7 | length 36.4
  Top Layer w0.2: v2(75.2,26.3) 80.75,31.85 DD1.52
  Bottom Layer w0.2: XP1.7 52.38,26.2 75.1,26.2 v2(75.2,26.3)
GPS_RST: DD1.49 XP1.8 | length 36.7
  Top Layer w0.2: XP1.8 51.7,29.42 51.7,27.4 52.5,26.6 73.8,26.6 79.25,32.05 DD1.49
GPS_RX: DD1.39 XP1.6 | length 23.5
  Top Layer w0.2: XP1.6 52.92,31.451 58.619,37.15 DD1.39
GPS_TX: DD1.40 XP1.5 | length 25.5
  Top Layer w0.2: XP1.5 54.2,29.48 54.2,32.166 58.684,36.65 DD1.40
GSM_ON: DD1.36 XP2.5 | length 57.8
  Top Layer w0.2: XP2.5 51.62,71.5 49.7,71.5 49.1,70.9 49.1,69.5 51.1,67.5 60.4,67.5 61.7,66.2 61.7,40.9 62.8,39.8 69.634,39.8 70.784,38.65 DD1.36
K-LINE: R10.2 R11.1 VT4.3 XP4.2 | length 16.7
  Top Layer w0.5: VT4.3 41.616,48.516 46.9,53.8 XP4.2
  Bottom Layer w0.4: R10.2 45.975,53.825 R11.1
  Bottom Layer w0.5: R11.1 XP4.2
K_RX: DD1.59 DD4.4 | length 69.2
  Top Layer w0.2: v2(61.8,34) v2(71.2,34) ; v2(81.7,31.2) 83.2,31.2 84.25,32.25 DD1.59
  Bottom Layer w0.2: DD4.4 39.21,44.91 38.4,44.1 34.6,44.1 33.9,43.4 33.9,39.634 37.134,36.4 54.034,36.4 57.034,33.4 57.7,33.4 61.2,33.4 v2(61.8,34) ; v2(71.2,34) 74,31.2 v2(81.7,31.2)
K_TX: DD1.60 DD4.5 | length 70.8
  Top Layer w0.2: v2(61.2,34.7) v2(69.5,34.7) ; v2(81,30.6) 83.2,30.6 84.75,32.15 DD1.60
  Bottom Layer w0.2: DD4.5 40.48,44.78 39.4,43.7 34.9,43.7 34.3,43.1 34.3,39.8 37.3,36.8 54.2,36.8 57.2,33.8 60.3,33.8 v2(61.2,34.7) ; v2(69.5,34.7) 73.6,30.6 v2(81,30.6)
L-LINE: R6.1 VT1.3 XP4.1 | length 8.4
  Top Layer w0.5: VT1.3 46.616,48.416 XP4.1
  Bottom Layer w0.5: R6.1 XP4.1
L_TX: DD1.58 DD4.9 | length 50.3
  Top Layer w0.2: v2(60.5,35.3) v2(71,35.3) ; v2(81.35,31.981) 83.281,31.981 83.75,32.45 DD1.58
  Bottom Layer w0.2: DD4.9 41.75,39.95 44.5,37.2 54.4,37.2 57.4,34.2 59.4,34.2 v2(60.5,35.3) ; v2(71,35.3) 74.319,31.981 v2(81.35,31.981)
MISO: DA1.12 DD1.46 DD2.2 | length 51.5
  Top Layer w0.2: DD2.2@47.347,37.165 49.635,37.165 49.9,36.9 54.8,36.9 v2(56,38.1) ; v2(58.6,35.5) 60.9,33.2 60.9,32.3 62.9,30.3 75.3,30.3 77.75,32.75 DD1.46
  Top Layer w0.3: DA1.12 v2(54,49.4)
  Bottom Layer w0.2: v2(54,49.4) 54,40.1 v2(56,38.1) v2(58.6,35.5)
MOSI: DA1.13 DD1.45 DD2.5 | length 66.6
  Top Layer w0.2: DD2.5 38.895,39.705 38.7,39.9 38.7,40.4 38.9,40.6 46.8,40.6 50.7,44.5 50.7,48.4 52.5,50.2 v2(53.2,50.2) ; v2(59.5,35.9) 59.5,35.3 61.3,33.5 61.3,32.5 63.1,30.7 75.1,30.7 77.25,32.85 DD1.45
  Top Layer w0.3: DA1.13 v2(53.2,50.2)
  Bottom Layer w0.2: v2(53.2,50.2) 54.4,50.2 54.7,49.9 54.7,40.7 v2(59.5,35.9)
NetC1_2: C1.2 DD1.19 QR1.1 | length 7
  Top Layer w0.2: QR1.1 74.9,50.1 75.75,49.25 DD1.19
  Top Layer w0.3: QR1.1 C1.2
NetC2_2: C2.2 DD1.20 QR1.2 | length 10.1
  Top Layer w0.2: QR1.2 70.9,50.6 71.7,49.8 74.6,49.8 75.25,49.15 DD1.20
  Top Layer w0.3: QR1.2 C2.2
NetC3_2: C3.2 DD1.13 QR2.1 | length 4.9
  Top Layer w0.2: DD1.13 78.75,50.25 QR2.1
  Top Layer w0.3: QR2.1 C3.2
NetC4_2: C4.2 DD1.15 QR2.2 | length 4.8
  Top Layer w0.2: QR2.2 77.75,50.45 DD1.15
  Top Layer w0.3: QR2.2 C4.2
NetC5_2: C5.2 DD1.14 R1.1 XP3.2 | length 20
  Top Layer w0.2: v2(77.9,46.7) 78.25,47.05 DD1.14
  Top Layer w0.3: v2(86,47.6) 86.025,47.625 R1.1 92.713,47.625 92.749,47.589 XP3.2
  Bottom Layer w0.2: v2(86,47.6) 78.8,47.6 v2(77.9,46.7) ; v2(77.9,46.7) 77.9,46.5 78.1,46.7 v2(77.9,46.7)
  Bottom Layer w0.3: C5.2 92.749,47.589 XP3.2
NetC10_1: C10.1 DD1.41 R2.1 XP1.16 | length 44.9
  Top Layer w0.2: v2(62.5,32.3) 63.7,31.1 73.1,31.1 75.25,33.25 DD1.41
  Top Layer w0.3: R2.1 40.183,30.725 40.249,30.791 C10.1
  Bottom Layer w0.2: XP1.16 42.48,33 58.6,33 59.3,32.3 v2(62.5,32.3)
NetC15_2: C15.2 C16.2 DD1.8 DD1.10 L1.2 | length 9.4
  Top Layer w0.2: v2(79.9,46.8) 80.25,47.15 DD1.10 80.25,49.45 80.6,49.8 80.9,49.8 81.25,49.45 DD1.8
  Bottom Layer w0.2: v2(79.9,46.8) 80.3,46.4 80.3,45.751 C15.2
  Bottom Layer w0.3: v2(81,49.8) 81.3,50.1 C16.2 81.349,51.1 L1.2
NetC23_1: C23.1 DD4.1 R10.1 R12.1 VD9.3 | length 21.6
  Bottom Layer w0.4: DD4.1 35.4,48.7 36.3,49.6 38.9,49.6 39.4,50.1 39.4,55 38.9,55.5 38.9,56.8 39.516,57.416 VD9.3 44.409,57.416 R12.1 ; R10.1 R12.1 ; C23.1 44.425,58.776 R12.1
NetC25_1: C25.1 C26.1 DA3.4 | length 3.1
  Top Layer w0.4: DA3.4 69.35,82.799 C26.1 C25.1
NetC25_2: C25.2 R26.1 | length 1.6
  Top Layer w0.4: R26.1 67.574,84.175 C25.2
NetC30_1: C30.1 R20.2 VD14.2 VD15.2 VD16.2 VT2.2 VT3.2 | length 30.6
  Top Layer w0.7: VD15.2 45.5,76.1 C30.1
  Top Layer w0.8: v3(36.1,79.9) v3(36.1,81.6) 36.1,82.6 36.52,83.02 VT2.2
  Bottom Layer w0.5: v3(36.1,81.6) 36.1,83.3 36.649,83.849 VD16.2 ; 40.45,81.15 42.168,82.868 VT3.2 44.132,82.868 45.3,81.7 R20.2
  Bottom Layer w0.8: v3(36.1,79.9) v3(36.1,81.6) 36.55,81.15 VD14.2@38.5,81.15
  Bottom Layer w1: VD14.2@38.5,81.15 40.45,81.15 41.1,80.5 VD15.2
NetC43_1: C43.1 DA4.1 | length 2.1
  Top Layer w0.2: DA4.1 C43.1 C43.1
NetC46_1: C46.1 DA4.5 DA4.6 XP15.2 | length 7.4
  Top Layer w0.2: DA4.5 84.65,68.55 84.8,68.7 84.8,68.9 84.65,69.05 DA4.6
  Bottom Layer w0.5: C46.1@94.5,71.8 94.5,73.6
  Bottom Layer w1: 94.5,73.6 XP15.2
  other v3: 86.5,69.3 87.524,70.3
NetC47_1: C47.1 DA4.13 R34.2 | length 5.9
  Top Layer w0.2: R34.2 77.9,71.7 79.55,70.05 DA4.13
  Top Layer w0.3: C47.1 76.676,73.125 R34.2
NetDA2_5: DA2.5 R19.1 R22.2 | length 4.8
  Top Layer w0.4: DA2.5 92.64,56.66 93.125,56.175 R22.2 R19.1
NetDA3_1: DA3.1 L2.1 VD18.2 | length 9.1
  Top Layer w0.5: DA3.1 73.645,77.195 VD18.2
  Top Layer w1: VD18.2 73.65,79.783 L2.1
NetDA3_5: DA3.5 R24.2 R25.1 | length 4
  Top Layer w0.4: R25.1 R24.2 62.725,81.575 63.295,81.005 DA3.5
NetDA4_7: DA4.7 R29.2 | length 6.1
  Top Layer w0.2: DA4.7 85.25,69.55 87.8,72.1 R29.2
NetDA4_8: DA4.8 R31.2 | length 4.8
  Top Layer w0.2: DA4.8 84.85,70.05 86.5,71.7 R31.2
NetDA4_9: DA4.9 R30.2 | length 3.6
  Top Layer w0.2: DA4.9 84.55,70.55 85.2,71.2 R30.2
NetDA4_10: DA4.10 R33.2 | length 2.6
  Top Layer w0.2: DA4.10 82.85,71.65 83.9,72.7 R33.2
NetDA4_12: DA4.12 R32.2 | length 3.5
  Top Layer w0.2: R32.2 79.2,71.1 79.75,70.55 DA4.12
NetDA4_14: DA4.14 R28.2 | length 7.1
  Top Layer w0.2: R28.2 75.3,72.2 77.95,69.55 DA4.14
NetDD3_6: DD3.6 FU2.2 VD1.1 | length 12.4
  Bottom Layer w0.4: FU2.2 56.9,56.1 57.5,56.7 VD1.1 61.2,56.7 62.86,55.04 DD3.6
NetDD3_7: DD3.7 FU1.2 VD1.2 | length 15.8
  Bottom Layer w0.4: FU1.2 56.9,59.2 57.368,58.732 VD1.2 62.768,58.732 64.13,57.37 DD3.7
NetDD3_8: DD3.8 R4.1 | length 3.5
  Bottom Layer w0.3: DD3.8 65.4,49 65.925,48.475 R4.1
NetDD4_2: DD4.2 DD4.3 | length 4.2
  Bottom Layer w0.4: DD4.2 36.67,48.57 36.9,48.8 37.7,48.8 37.94,48.56 DD4.3
NetDD4_6: DD4.6 R14.1 | length 10
  Top Layer w0.3: R14.1 37.825,47.025 v2(40,49.2)
  Bottom Layer w0.3: v2(40,49.2) 41.2,49.2 41.75,48.65 DD4.6
NetDD4_8: DD4.8 R7.1 | length 4.7
  Top Layer w0.3: v2(44.1,43.7) 44.125,43.675 R7.1
  Bottom Layer w0.3: DD4.8 43.02,43.22 43.5,43.7 v2(44.1,43.7)
NetFU5_2: FU5.2 VD14.1 | length 3.3
  Bottom Layer w1: FU5.2 36.08,77.1 38.15,77.1 VD14.1@38.5,76.75
NetR5_1: R5.1 R6.2 | length 1.8
  Bottom Layer w0.5: R5.1 R6.2
NetR7_2: R7.2 R8.1 VT1.1 | length 3.4
  Top Layer w0.3: VT1.1 45.6,43.425 R8.1 45.675,43.351 R7.2
NetR9_1: R9.1 R11.2 | length 1.8
  Bottom Layer w0.5: R9.1 R11.2
NetR14_2: R14.2 R17.1 VT4.1 | length 3.1
  Top Layer w0.3: R14.2 R17.1 40.6,43.525 VT4.1
NetR20_1: R20.1 R21.1 VD17.2 | length 5.9
  Bottom Layer w0.5: R20.1 47.249,84.851 VD17.2 49.7,86.7 49.3,87.1 R21.1
NetR21_2: R21.2 VT3.1 | length 3.6
  Bottom Layer w0.4: VT3.1 44.5,84.9 45.1,85.5 R21.2
NetR23_1: R23.1 VD16.1 VT2.1 VT3.3 | length 10.5
  Top Layer w0.4: v1(35.9,87.2) 36.28,87.58 VT2.1
  Bottom Layer w0.4: v1(35.9,87.2) 37.751,87.2 VD16.1 39.949,87.151 39.949,84.151 40.216,83.884 VT3.3
PWRMON: DD1.32 XP2.6 | length 49.8
  Top Layer w0.2: XP2.6 54.2,71.46 54.2,69 54.9,68.3 60.731,68.3 62.5,66.531 62.5,41.4 63.25,40.65 DD1.32
RESET: DD1.35 XP2.7 | length 50.5
  Top Layer w0.2: XP2.7 52.68,67.9 60.566,67.9 62.1,66.366 62.1,41.2 63.1,40.2 69.8,40.2 70.85,39.15 DD1.35
RXD: DD1.68 XP2.10 | length 89.7
  Top Layer w0.2: XP2.10 46.6,71.5 46.6,69 48.9,66.7 60,66.7 60.9,65.8 v2(60.9,39.2) ; v2(79.5,29.4) 83.3,29.4 90,36.1 90,39.7 89.55,40.15 DD1.68
  Bottom Layer w0.2: v2(60.9,39.2) 60.9,38.8 69.8,29.9 73,29.9 73.5,29.4 v2(79.5,29.4)
RXD0: DD1.80 XP1.2 | length 51.6
  Top Layer w0.2: XP1.2 60.14,28.6 72.3,28.6 v2(72.5,28.8) ; v2(77.4,27.4) 82.997,27.4 91.2,35.603 91.2,43.5 88.55,46.15 DD1.80
  Bottom Layer w0.2: v2(72.5,28.8) 73.7,27.6 77.2,27.6 v2(77.4,27.4)
SCK: DA1.14 DD1.47 DD2.6 | length 62.3
  Top Layer w0.2: DD2.6 38.865,38.435 38.3,39 38.3,40.7 38.6,41 46.634,41 50,44.366 v2(50,46.5) ; v2(58,34.9) 60.3,32.6 60.3,32.3 62.7,29.9 75.5,29.9 78.25,32.65 DD1.47
  Top Layer w0.3: v2(51.4,46.5) DA1.14
  Bottom Layer w0.2: v2(50,46.5) v2(51.4,46.5) 51.4,41.5 v2(58,34.9)
SS0: DA1.7 DD1.48 | length 37.3
  Top Layer w0.2: v2(68.1,29.2) 68.4,29.5 75.8,29.5 78.75,32.45 DD1.48
  Top Layer w0.3: DA1.7 v2(59.6,46.5)
  Bottom Layer w0.2: v2(59.6,46.5) 59.6,37.7 v2(68.1,29.2)
SS1: DD1.73 DD2.1 | length 60.5
  Top Layer w0.2: DD2.1@47.347,35.895 55.995,35.895 57.7,37.6 60.1,37.6 v2(60.4,37.9) ; v2(78.7,28.8) 83.266,28.8 90.4,35.934 90.4,41.7 89.45,42.65 DD1.73
  Bottom Layer w0.2: v2(60.4,37.9) 68.8,29.5 72.8,29.5 73.5,28.8 v2(78.7,28.8)
STAT_LED: DD1.51 XP1.9 | length 38.1
  Top Layer w0.2: XP1.9 49.64,26.4 52.134,26.4 52.334,26.2 74,26.2 80.25,32.45 DD1.51
TXD: DD1.65 XP2.9 | length 82.2
  Top Layer w0.2: XP2.9 47.84,69.26 50,67.1 60.2,67.1 61.3,66 61.3,40.2 v2(61.5,40) ; v2(80.2,30) 83.334,30 89.6,36.266 89.6,38.2 89.15,38.65 DD1.65
  Bottom Layer w0.2: v2(61.5,40) 61.5,39.1 70.3,30.3 73.2,30.3 73.5,30 v2(80.2,30)
TXD0: DD1.79 XP1.1 | length 48.5
  Top Layer w0.2: XP1.1 v2(74.5,28.2) ; v2(78,28.2) 83.231,28.2 90.8,35.769 90.8,43.3 88.45,45.65 DD1.79
  Bottom Layer w0.2: v2(74.5,28.2) v2(78,28.2)
V_SD: C38.1 C39.1 C44.1 DA4.4 L2.2 R25.2 R29.1 R30.1 R31.1 VD19.2 XP1.10 | length 105.8
  Top Layer w0.2: DA4.4 84.55,68.05
  Top Layer w0.3: 85.3,75.7 85.2,75.6 R30.1 R31.1 ; 86.5,75.8 R31.1 ; 87.7,75.7 87.8,75.6 R29.1 R31.1
  Top Layer w0.4: R25.2 63.075,84.275 v1(63.1,84.3) ; v1(67.8,87.1) VD19.2 ; 84.55,68.05 85.349,67.251 C44.1
  Bottom Layer w0.4: XP1.10 49.4,32.3 58.5,32.3 63.6,27.2 63.7,27.1 76.1,27.1 76.6,26.6 82.6,26.6 96.9,40.9 96.9,50.7 91,56.6 91,64.2 v1(88,67.2) ; v1(63.1,84.3) 65.7,84.3 67.8,86.4 v1(67.8,87.1)
V_SYSTEM: C29.1 DD1.6 R16.1 R18.2 | length 13.4
  Top Layer w0.2: DD1.6 82.25,53.95 82.8,54.5 R18.2
  Top Layer w0.3: C29.1 81.524,55.425 R18.2 83.525,55.425 83.8,55.7 83.8,58 83.575,58.225 R16.1
V_VIN: C27.1 DD1.7 R13.1 R15.1 VD8.3 | length 27
  Top Layer w0.2: C27.1 72.749,61.151 74.4,59.5 76.8,59.5 80.5,55.8 80.5,54.6 81.75,53.35 DD1.7
  Top Layer w0.3: R13.1@66.375,63.6 66.391,63.616 VD8.3 72.709,63.616 R15.1 72.725,62.224 C27.1
VCC: C33.1 C34.2 C45.1 DA2.1 DA2.2 DA4.15 DA4.16 DA4.17 R16.2 XP2.1 XP2.2 | length 16
  Top Layer w0.2: 79.45,68.55 DA4.16 ; DA4.17 79.55,68.05 79.4,68.2 79.4,68.5 79.4,68.8 79.65,69.05 DA4.15
  Top Layer w0.4: C45.1 79.351,68.451 79.4,68.5 79.45,68.55 ; 87.5,59.2 88.151,59.851 C34.2 ; DA2.2 88.181,60.47 C34.2 ; DA2.1 89.86,61.74 89.3,62.3 C33.1 88.151,62.249 C34.2
  Top Layer w0.7: 76.6,68.5 76.649,68.451 C45.1
VIBRATION: DD1.27 R3.1 SW1.1 | length 36.9
  Top Layer w0.2: v2(64.1,59.7) 64.1,45.9 66.85,43.15 DD1.27
  Top Layer w0.3: SW1.1 54.925,56.825 R3.1 59.625,56.825 60,57.2 v2(60,60.3)
  Bottom Layer w0.3: v2(60,60.3) 60.6,59.7 v2(64.1,59.7)
VIN: FU5.1 XP4.6 | length 25.8
  Top Layer w1: FU5.1 30.5,75.8 42.5,63.8 XP4.6
VIN_F: C24.1 C37.2 DA3.8 R5.2 R9.2 R13.2 VT2.3 | length 62.5
  Top Layer w0.3: R13.2 v1(66.3,66.4)
  Top Layer w0.5: 59.5,77 61.751,77 C24.1@61.8,77.049 ; C24.1 62.749,76.949 62.995,77.195 DA3.8
  Bottom Layer w0.3: v1(59.4,76.35) 59.35,76.35 59.9,75.8 59.9,72.8 v1(66.3,66.4) 66.3,66.2 66.45,66.35 v1@66.35,66.45
  Bottom Layer w0.5: R5.2 R9.2 ; R9.2 37.8,56
  Bottom Layer w1: 37.8,56 37.8,74 38.4,74.6 49.1,74.6 53.9,79.4 C37.2
pads on no net: 1.1 2.1 3.1 4.1 DA1.8 DA1.9 DA3.2 DA3.6 DA4.2 DA4.3 DA4.18 DD1.1 DD1.2 DD1.3 DD1.4 DD1.5 DD1.11 DD1.16 DD1.17 DD1.18 DD1.22 DD1.23 DD1.25 DD1.26 DD1.28 DD1.29 DD1.30 DD1.44 DD1.50 DD1.53 DD1.54 DD1.55 DD1.61 DD1.62 DD1.63 DD1.64 DD1.69 DD1.70 DD1.71 DD1.72 DD1.74 DD1.75 DD1.76 DD4.10 DD4.11 DD4.12 DD4.13 XP1.11 XP1.12 XP1.13 XP1.14 XP2.8 XP15.3

## Polygon pours and split planes (outlines as drawn)
VIN_F on Top Layer "Top Layer-No Net" (hatched Horizontal grid 0.15 track 0.2, remove dead copper, pour order 14): 41.1,88.9 48.5,88.9 53.2,84.2 58,84.2 59.8,82.4 59.8,76.3 58.6,75.1 53.2,75.1 53.2,76.9 49.6,80.5 41.1,80.5
V_SD on Top Layer "Bottom Layer-No Net" (hatched Horizontal grid 0.2 track 0.25, remove dead copper, pour order 17): 69.2,86.3 79.5,86.3 81.1,84.7 81.2,84.6 84.1,84.6 85.1,84.6 85.6,84.1 85.6,78.6 85.6,76.8 84.8,76 84.7,75.9 84.7,75.4 88.7,75.4 89,75.1 89,69.8 87,67.8 86.8,67.6 85.9,67.6 85.9,66.8 88.7,66.8 88.7,66.9 90.5,68.7 91.2,69.4 91.2,74.2 91.2,75.5 90,76.7 88,78.7 88,83.4 88,86.6 87.8,86.8 87.7,86.9 87.7,88.9 69.2,88.9
+3V on Top Layer "Top Layer-No Net" (hatched Horizontal grid 0.15 track 0.2, remove dead copper, pour order 13): 89.7,58.5 89.7,51.8 86,51.8 86,54.6 86.9,55.5 87.5,56.1 87.5,58.5
NetC46_1 on Top Layer "Top Layer-No Net" (hatched Horizontal grid 0.15 track 0.2, remove dead copper, pour order 11): 84.8,68.7 86.9,68.7 88.2,70 88.2,71.6 88,71.6 87.5,71.1 85.5,69.1 85,69.1 84.8,68.9
VCC on Top Layer "Bottom Layer-No Net" (hatched Horizontal grid 0.2 track 0.25, remove dead copper, pour order 23): 56.7,69 67.5,69 70.6,65.9 73.9,65.9 80.2,59.6 83.5,59.6 84.2,58.9 88.2,58.9 88.7,59.4 88.7,62.6 87.3,62.6 87.3,59.8 87,59.5 85,59.5 82.5,62 80.5,62 77,65.5 77,68.8 71.9,73.9 56.7,73.9
GND on Top Layer "Top Layer-No Net" (hatched Horizontal grid 0.15 track 0.2, remove dead copper, pour order 18): 26,26 100,26 100,89 26,89
NetC46_1 on Bottom Layer "Top Layer-No Net" (hatched Horizontal grid 0.15 track 0.2, remove dead copper, pour order 12): 85.9,68.6 92.3,68.6 95,71.3 95,74.4 90.9,74.4 85.9,69.4
GND on Bottom Layer "Top Layer-No Net" (hatched Horizontal grid 0.15 track 0.2, remove dead copper, pour order 15): 26,26 100,26 100,89 26,89
GND on GND (split plane): 99.99,26.01 26.01,26.01 26.01,88.99 99.99,88.99
+3V on VCC (split plane): 99.99,26.01 26.01,26.01 26.01,88.99 99.99,88.99

## Keep-outs
Keep-Out Layer:
  the board outline again, w0.2

## Other copper
Top Layer:
  pour cut-out: 71.3,85.4 71.3,82.6 79,82.6 79,85.4
  pour cut-out: 81.025,70.375 81.7,70.375 81.7,71.813 81.013,71.813 81.013,71.65
  pour cut-out: 81.7,67.225 81.025,67.225 81.025,65.775 81.7,65.775
  pour cut-out: 53.7,39.3 56.5,39.3 56.6,39.4 56.6,44.6 53.7,44.6

## Silkscreen, mask and mechanical layers (free items; w line width, h text height)
Top Overlay:
  lines w0.254: 65.1,84.3 64.6,84.3 63.1,85.8 ; 93.2,53.9 93.5,53.6 94.1,53.6 ; 63.1,85.8 63.1,85.8
Mechanical 1:
  lines w0.254: 30,25.5 30,75.5 100.5,75.5 100.5,25.5
Mark_TOP:
  text "BI_820_Trek_OBD_main_hv2 TOP" at 41.2,21.6 h1.52
Mark_BOT:
  text "BI_820_Trek_OBD_main_hv2 BOT" at 82.5,21.6 h1.52